# EAGLE board Trial_1_ECE411_Group_15-4 (EAGLE 9.2.0)
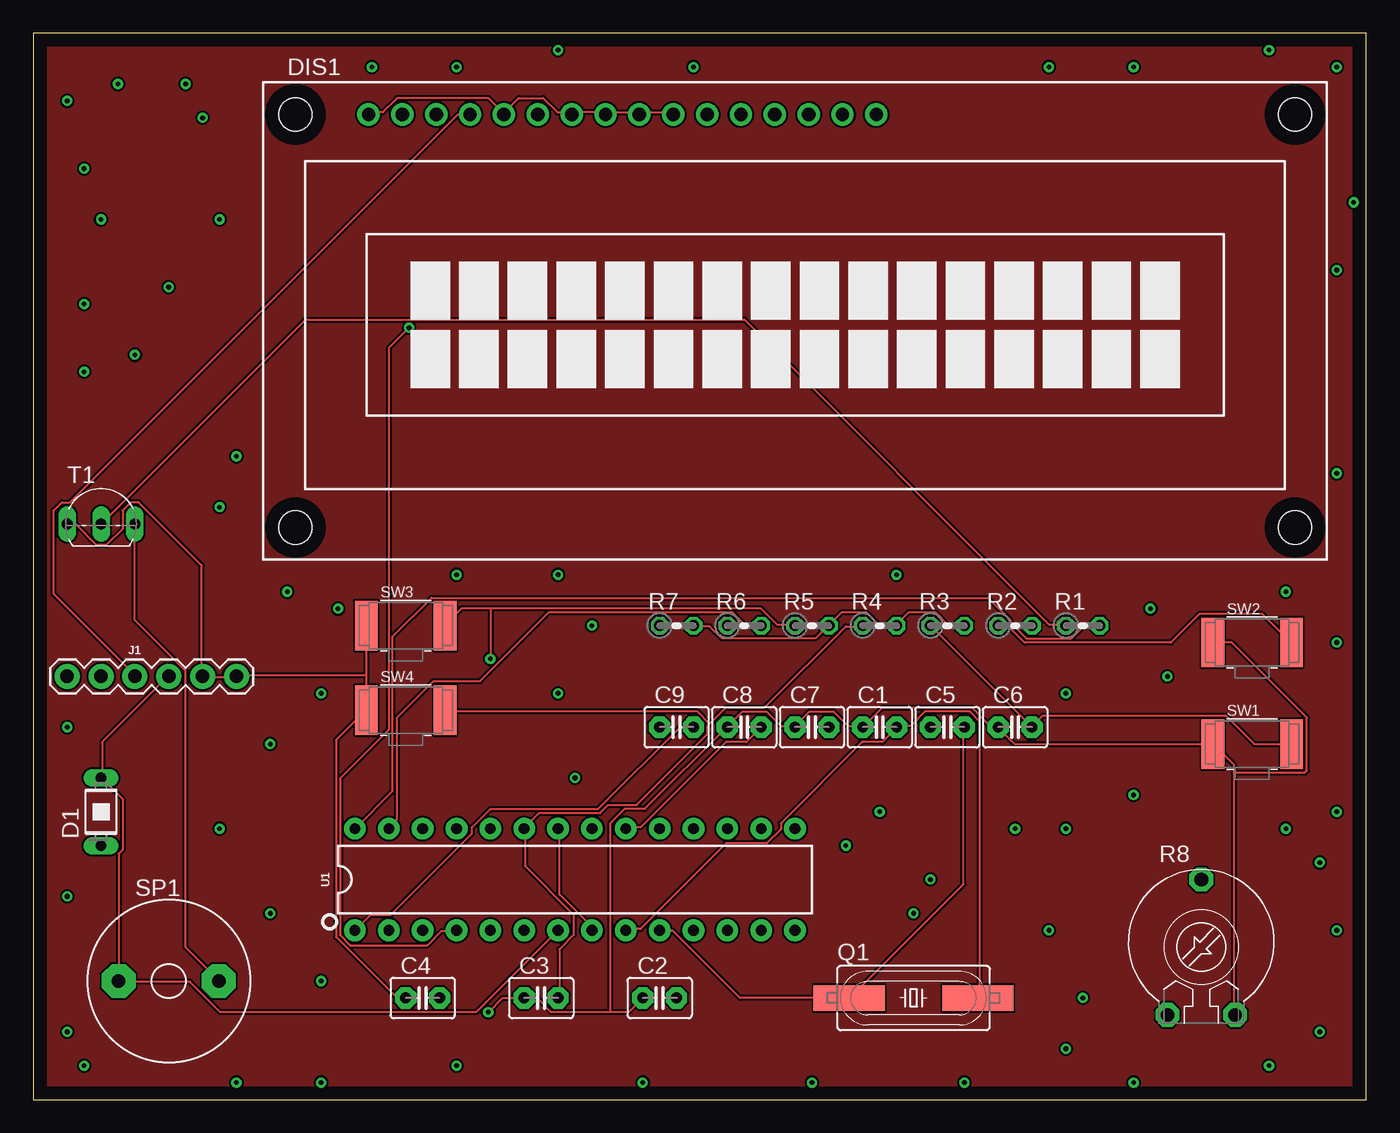
[diagram p0: board, top side]
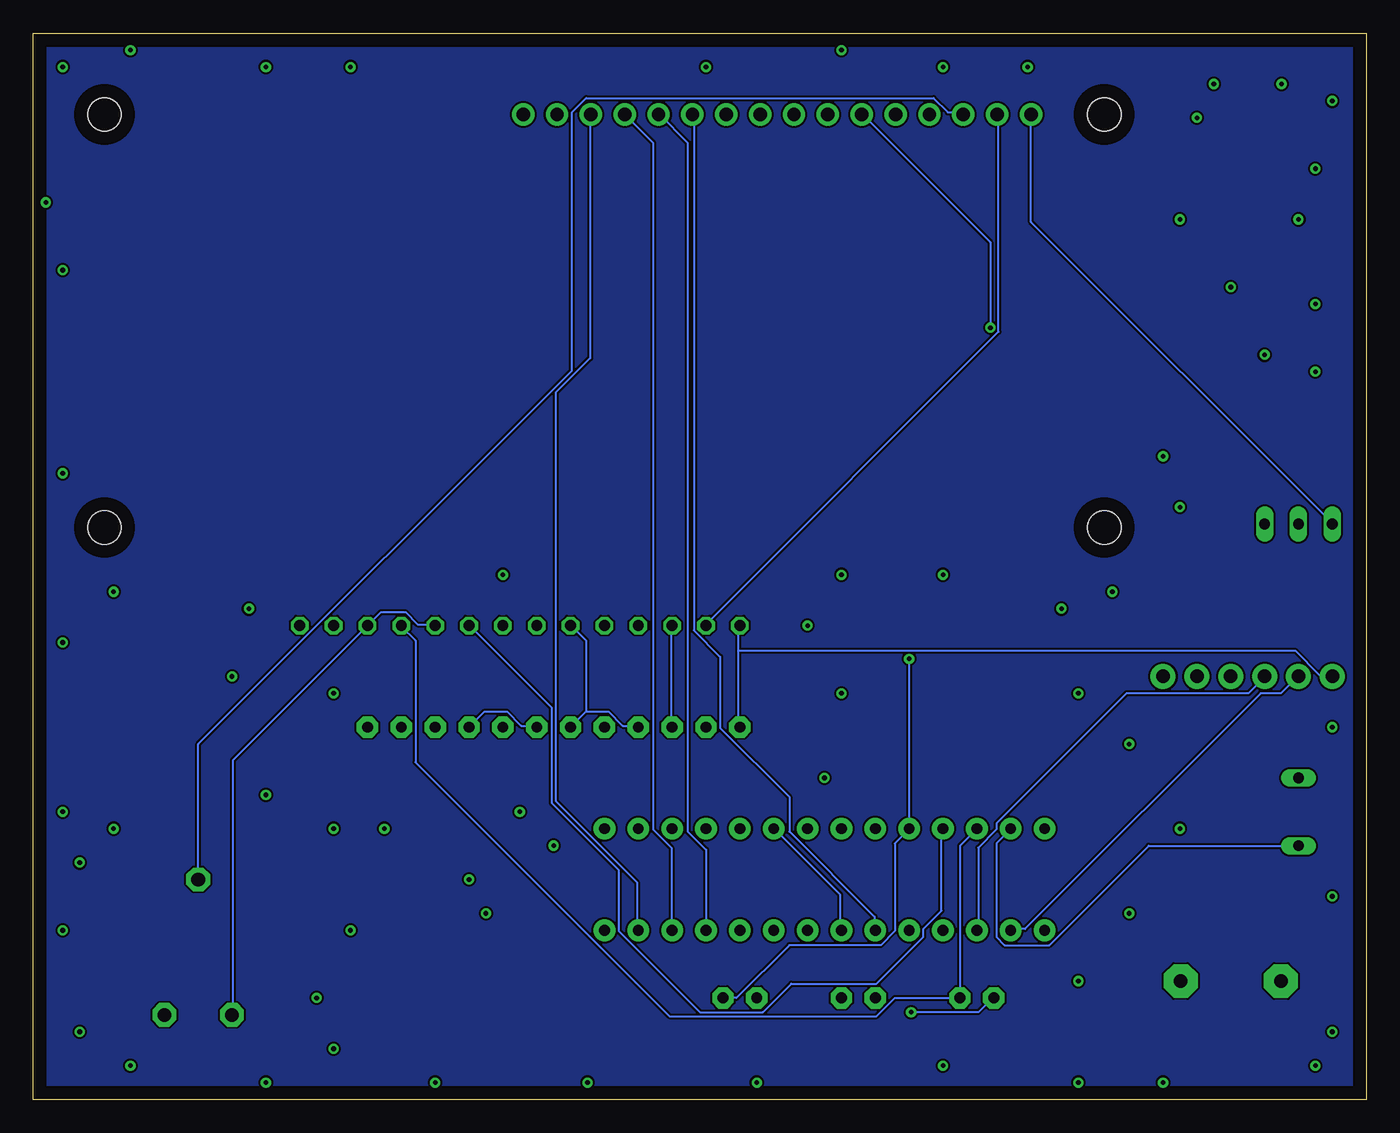
[diagram p1: board, bottom side, seen from below]

Size 100 x 80 mm. Coordinates in mm from the lower left corner, seen from the top.
Outline: 0,0 100,0 100,80 0,80 0,0
Copper layers (1*16): Top 0.035mm / dielectric 1.5mm / Bottom 0.035mm
Design rules "default": minimum track width 6mil, minimum drill 0.35mm, track to track 6mil, track to pad 6mil, pad to pad 6mil, via to via 6mil, smd to smd 6mil, copper to edge 40mil, drill to drill 6mil, minimum pad ring 10mil, minimum via ring 8mil, stop-mask expansion 4mil, vias tented up to drill 0mil, thermal gap 10mil

## Footprints (pad centres in the part's own frame; a part is rotated, then mirrored left to right if it is on the bottom)
C2.5-3 = drill 0.813 pad 1.6 octagon: 1 -1.27,0; 2 1.27,0
BPW32 = drill 0.813 long: A 0,2.54; K 0,-2.54
TUXGR_16X2_R2 = drill 1 pad 1.676: 1 -32,15.5; 2 -29.46,15.5; 3 -26.92,15.5; 4 -24.38,15.5; 5 -21.84,15.5; 6 -19.3,15.5; 7 -16.76,15.5; 8 -14.22,15.5; 9 -11.68,15.5; 10 -9.14,15.5; 11 -6.6,15.5; 12 -4.06,15.5; 13 -1.52,15.5; 14 1.02,15.5; 15 3.56,15.5; 16 6.1,15.5 | hole 2.5: -37.5,-15.5; 37.5,-15.5; -37.5,15.5; 37.5,15.5
FTDI_BASIC = drill 1.016 pad 1.88: CTS 10.16,0; DTR 0,0; GND 12.7,0; RXI 2.54,0; TXO 5.08,0; VCC 7.62,0
HC49UP = smd 5.334 x 1.93: 1 -4.826,0; 2 4.826,0
0204V = drill 0.813 octagon: 1 -1.27,0; 2 1.27,0
PT-10 = drill 1.016 pad 1.778 octagon: 1 -2.54,-5.08; 2 2.54,-5.08; 3 0,5.08
AL60P = drill 1.016 pad 2.54 octagon: 1 -3.759,0; 2 3.759,0
BTN_CK_KSS = smd 1.7 x 3.7: P$1 -2.95,0; P$2 2.95,0
TO92-EBC-OVAL = drill 0.813 long: B 0,-1.27; C 2.54,-1.27; E -2.54,-1.27
DIP28 = drill 0.813 pad 1.626: 1 -16.51,-3.81; 2 -13.97,-3.81; 3 -11.43,-3.81; 4 -8.89,-3.81; 5 -6.35,-3.81; 6 -3.81,-3.81; 7 -1.27,-3.81; 8 1.27,-3.81; 9 3.81,-3.81; 10 6.35,-3.81; 11 8.89,-3.81; 12 11.43,-3.81; 13 13.97,-3.81; 14 16.51,-3.81; 15 16.51,3.81; 16 13.97,3.81; 17 11.43,3.81; 18 8.89,3.81; 19 6.35,3.81; 20 3.81,3.81; 21 1.27,3.81; 22 -1.27,3.81; 23 -3.81,3.81; 24 -6.35,3.81; 25 -8.89,3.81; 26 -11.43,3.81; 27 -13.97,3.81; 28 -16.51,3.81

## Placement (x,y rotation side)
C1  18p  [C2.5-3]  63.5,27.94 0 top
C2  100n  [C2.5-3]  46.99,7.62 0 top
C3  100n  [C2.5-3]  38.1,7.62 0 top
C4  100n  [C2.5-3]  29.21,7.62 0 top
C5  18p  [C2.5-3]  68.58,27.94 0 top
C6  100n  [C2.5-3]  73.66,27.94 0 top
C7  0.1u  [C2.5-3]  58.42,27.94 0 top
C8  0.1u  [C2.5-3]  53.34,27.94 0 top
C9  0.1u  [C2.5-3]  48.26,27.94 0 top
D1  BPW32  [BPW32]  5.08,21.59 0 top
DIS1  TUXGR_16X2_R2  [TUXGR_16X2_R2]  57.15,58.42 0 top
J1  6_PIN_SERIAL_CABLEPTH  [FTDI_BASIC]  2.54,31.75 0 top
Q1  12 MHz  [HC49UP]  66.04,7.62 0 top
R1  200  [0204V]  78.74,35.56 0 top
R2  10k  [0204V]  73.66,35.56 0 top
R3  10k  [0204V]  68.58,35.56 0 top
R4  10k  [0204V]  63.5,35.56 0 top
R5  10k  [0204V]  58.42,35.56 0 top
R6  1k  [0204V]  53.34,35.56 0 top
R7  10k  [0204V]  48.26,35.56 0 top
R8  10k  [PT-10]  87.63,11.43 0 top
SP1  SPEAKER/AL60P  [AL60P]  10.16,8.89 0 top
SW1  [BTN_CK_KSS]  91.44,26.67 0 top
SW2  [BTN_CK_KSS]  91.44,34.29 0 top
SW3  [BTN_CK_KSS]  27.94,35.56 0 top
SW4  [BTN_CK_KSS]  27.94,29.21 0 top
T1  2N2222  [TO92-EBC-OVAL]  5.08,44.45 0 top
U1  328P  [DIP28]  40.64,16.51 0 top

## Library data of the parts
C1-C9 = capacitor-wima
D1 = opto-trans-siemens; OC_FARNELL: unknown; OC_NEWARK: unknown
DIS1 = display-lcd; OC_FARNELL: unknown; OC_NEWARK: unknown
J1 = SparkFun-Connectors
Q1 = adafruit; OC_FARNELL: unknown; OC_NEWARK: unknown
R1-R7 = rcl; SPICEPREFIX: R
R8 = rcl; SPICEMODEL: POT; SPICEPREFIX: X
SP1 SW1-SW4 T1 = adafruit
U1 = SparkFun-IC-Microcontroller; PROD_ID: IC-09136

## Nets
0: C1.1 C2.1 C3.1 C4.1 C5.1 C6.1 C7.1 C8.1 DIS1.1 DIS1.5 DIS1.7 DIS1.8 DIS1.9 DIS1.10 J1.CTS J1.GND R6.1 R8.2 SW1.P$1 SW2.P$1 SW3.P$1 SW4.P$1 T1.E
N$1: C1.2 Q1.2 U1.9
N$2: C5.2 Q1.1 U1.10
N$3: SP1.2 T1.C
N$4: R1.1 T1.B
N$5: C3.2 R4.1 SW4.P$2 U1.23
N$6: C4.2 R2.1 SW2.P$2 U1.26
N$7: J1.RXI U1.2
N$8: C6.2 R3.1 SW1.P$2 U1.25
N$9: DIS1.4 J1.TXO U1.3
N$10: C2.2 R5.1 SW3.P$2 U1.24
N$11: DIS1.3 R8.3
N$13: DIS1.11 U1.6
N$14: DIS1.12 U1.11
N$15: DIS1.13 U1.12
N$16: DIS1.14 U1.13
N$17: D1.K R6.2 U1.27
N$18: R1.2 U1.28
N$19: U1.8 U1.22
N$20: C9.1 J1.DTR R7.1
N$23: DIS1.6 U1.4
N$24: C9.2 U1.1
VCC: C7.2 C8.2 D1.A DIS1.2 J1.VCC R2.2 R3.2 R4.2 R5.2 R7.2 R8.1 SP1.1 U1.7 U1.20

## Tracks (layer width: path | path; a pad name or v marks a point on that pad's centre or on a via)
0  (via drill 0.35)
  Top 0.152: 90.07,24.54 90.07,25.15 88.54,26.67 SW1.P$1 73.61,26.67 72.39,27.89 C6.1 72.39,28.04 71.78,28.04 70.41,29.41 63.7,29.41 C1.1 62.18,28.04 61.11,28.04 60.05,29.11 58.22,29.11 57.15,28.04 | 90.07,24.54 90.07,6.4 R8.2 | SW2.P$1 89.92,34.29 95.56,28.65 95.56,24.69 95.4,24.54 90.07,24.54 | 43.28,6.55 44.65,6.55 C2.1 | 43.28,6.55 38.86,6.55 37.8,7.62 C3.1 35.2,7.62 v34.14,6.55 | 57.15,28.04 56.08,28.04 55.02,29.11 53.19,29.11 52.12,28.04 C8.1 51.97,27.89 45.87,21.79 44.35,21.79 43.28,20.73 43.28,6.55 | 57.15,28.04 C7.1 | C4.1 27.28,7.62 22.71,12.19 22.71,26.98 24.84,29.11 SW4.P$1 24.99,29.26 24.99,31.85 | 24.99,31.85 24.99,35.51 SW3.P$1 | DIS1.10 48.01,74.07 45.57,74.07 DIS1.9 45.41,74.07 42.98,74.07 DIS1.8 42.82,74.07 40.54,74.07 DIS1.7 40.39,74.07 39.32,74.07 38.25,75.13 36.42,75.13 35.36,74.07 DIS1.5 35.2,74.07 34.14,75.13 27.28,75.13 26.21,74.07 25.3,74.07 DIS1.1 | T1.E 2.59,43.13 3.2,43.13 4.72,41.6 5.49,41.6 6.71,42.82 6.71,44.2 7.32,44.81 7.92,44.81 12.65,40.08 12.65,31.85 J1.CTS 12.8,31.7 15.24,31.7 J1.GND 15.24,31.85 24.99,31.85
  Bottom 0.152: C5.1 66.14,29.11 64.47,29.11 63.4,28.04 62.33,28.04 C1.1 | R6.1 52.12,35.51 52.12,28.04 C8.1 | DIS1.1 25.15,65.84 2.59,43.28 T1.E | v34.14,6.55 29.11,6.55 28.04,7.62 C4.1
GND
  pour Top: 0,80.01 100.33,80.01 100.33,0 0,0 0,43.18
  pour Bottom: 0,80.01 100.33,80.01 100.33,0 41.91,0 0,0 0,36.83
N$1
  Top 0.152: Q1.2 71.02,7.77 71.02,28.35 70.26,29.11 66.9,29.11 65.84,28.04 64.77,28.04 C1.2 64.77,27.89 63.7,26.82 62.18,26.82 56.08,20.73 56.08,20.27 55.02,19.2 51.97,19.2 45.57,12.8 44.5,12.8 U1.9
N$2
  Top 0.152: C5.2 69.8,27.89 69.8,16.15 61.27,7.62 Q1.1 53.03,7.62 48.01,12.65 47.09,12.65 U1.10
N$3
  Top 0.152: T1.C 7.62,35.97 11.43,32.16 11.43,11.43 13.87,8.99 SP1.2
N$4
  Top 0.152: T1.B 20.42,58.52 53.34,58.52 76.2,35.66 77.42,35.66 R1.1
N$5
  Top 0.152: 50.75,28.19 50.6,28.04 50.6,27.43 45.26,22.1 43.13,22.1 42.52,21.49 37.95,21.49 36.88,20.42 U1.23 36.88,20.27 36.88,17.53 40.54,13.87 40.54,12.34 39.47,11.28 39.47,7.62 C3.2 | 50.75,28.19 51.97,29.41 54.86,29.41 60.96,35.51 62.18,35.51 R4.1 | 50.75,28.19 49.84,29.11 30.94,29.11 SW4.P$2
N$6
  Top 0.152: R2.1 72.39,35.51 73.15,35.51 74.37,34.29 85.34,34.29 87.48,36.42 92.2,36.42 94.34,34.29 SW2.P$2
  Bottom 0.152: U1.26 30.48,19.05 C4.2 35.36,7.62 36.73,6.25 52.27,6.25 71.32,25.3 71.32,34.44 72.39,35.51 R2.1
N$7
  Bottom 0.152: U1.2 26.67,12.8 25.6,12.8 7.92,30.48 6.4,30.48 5.18,31.7 J1.RXI
N$8
  Top 0.152: R3.1 C6.2 74.98,28.04 75.74,28.8 89.46,28.8 91.59,26.67 SW1.P$2
  Bottom 0.152: U1.25 31.85,20.27 31.85,14.17 33.22,12.8 33.22,12.19 36.73,8.69 43.13,8.69 45.26,6.55 49.99,6.55 56.08,12.65 56.08,17.22 61.11,22.25 61.11,29.41 67.21,35.51 R3.1
N$9
  Top 0.152: DIS1.4 31.85,73.91 2.74,44.81 2.13,44.81 1.52,44.2 1.52,37.95 7.62,31.85 J1.TXO
  Bottom 0.152: U1.3 29.11,12.8 29.11,18.9 27.74,20.27 27.74,20.73 17.98,30.48 8.84,30.48 7.62,31.7 J1.TXO
N$10  (via drill 0.35)
  Top 0.152: 34.29,36.88 32.16,36.88 30.94,35.66 SW3.P$2 | 34.29,36.88 54.56,36.88 55.78,35.66 57.15,35.66 R5.1 | 34.29,36.88 v34.29,33.07
  Bottom 0.152: C2.2 47.24,7.62 43.28,11.58 36.42,11.58 35.36,12.65 35.36,19.2 34.29,20.27 U1.24 v34.29,33.07
N$11
  Bottom 0.152: R8.3 87.63,26.67 59.59,54.71 59.59,74.07 58.52,75.13 32.46,75.13 31.39,74.07 30.33,74.07 DIS1.3
N$12  (via drill 0.35)
  other vias: 6.35,76.2
N$13
  Bottom 0.152: U1.6 36.88,12.8 36.88,13.72 43.28,20.12 43.28,22.71 48.46,27.89 48.46,33.22 50.44,35.2 50.44,73.91 DIS1.11
N$14
  Bottom 0.152: U1.11 49.53,18.75 50.9,20.12 50.9,71.78 53.03,73.91 DIS1.12
N$15
  Bottom 0.152: U1.12 52.12,12.8 52.12,18.9 53.49,20.27 53.49,71.78 DIS1.13
N$16
  Bottom 0.152: U1.13 54.71,12.8 54.71,16.31 60.81,22.4 60.81,53.03 58.22,55.63 58.22,73.91 DIS1.14
N$17
  Top 0.152: R6.2 54.56,35.66 53.34,35.66 52.43,36.58 38.71,36.58 33.53,31.39 30.02,31.39 27.28,28.65 27.28,21.03 26.67,20.42 U1.27
  Bottom 0.152: D1.K 16.31,19.05 23.77,11.58 27.13,11.58 27.74,12.19 27.74,19.2 26.67,20.27 U1.27
N$18
  Top 0.152: U1.28 26.98,23.16 26.98,34.75 29.87,37.64 71.63,37.64 73.3,35.97 73.3,35.81 74.52,34.59 77.88,34.59 78.79,35.51 80.01,35.51 R1.2
N$19
  Top 0.152: U1.8 41.91,12.95 39.47,15.39 39.47,20.27 U1.22
N$20
  Bottom 0.152: 47.09,33.68 47.09,28.04 C9.1 | 47.09,33.68 47.09,35.51 R7.1 | 47.09,33.68 5.33,33.68 3.5,31.85 2.59,31.85 J1.DTR
N$21  (via drill 0.35)
  other vias: 2.54,74.93
N$22  (via drill 0.35)
  other vias: 5.08,66.04
N$23  (via drill 0.35)
  Top 0.152: v28.19,57.91 26.67,56.39 26.67,27.74 23.01,24.08 23.01,12.34 23.77,11.58 29.57,11.58 30.63,12.65 31.7,12.65 U1.4
  Bottom 0.152: v28.19,57.91 28.19,64.31 37.8,73.91 DIS1.6
N$24
  Top 0.152: U1.1 25.3,13.87 26.82,13.87 32.92,19.96 32.92,20.42 34.29,21.79 42.37,21.79 48.46,27.89 49.53,27.89 C9.2
N$25  (via drill 0.35)
  other vias: 13.97,66.04
N$26  (via drill 0.35)
  other vias: 10.16,60.96
N$27  (via drill 0.35)
  other vias: 3.81,54.61
N$28  (via drill 0.35)
  other vias: 12.7,73.66
N$29  (via drill 0.35)
  other vias: 25.4,77.47
N$30  (via drill 0.35)
  other vias: 39.37,78.74
N$31  (via drill 0.35)
  other vias: 49.53,77.47
N$32  (via drill 0.35)
  other vias: 82.55,77.47
N$33  (via drill 0.35)
  other vias: 76.2,77.47
N$34  (via drill 0.35)
  other vias: 92.71,78.74
N$35  (via drill 0.35)
  other vias: 97.79,77.47
N$36  (via drill 0.35)
  other vias: 99.06,67.31
N$37  (via drill 0.35)
  other vias: 97.79,62.23
N$38  (via drill 0.35)
  other vias: 97.79,46.99
N$39  (via drill 0.35)
  other vias: 97.79,34.29
N$40  (via drill 0.35)
  other vias: 83.82,36.83
N$41  (via drill 0.35)
  other vias: 77.47,20.32
N$42  (via drill 0.35)
  other vias: 82.55,22.86
N$43  (via drill 0.35)
  other vias: 76.2,12.7
N$44  (via drill 0.35)
  other vias: 78.74,7.62
N$45  (via drill 0.35)
  other vias: 97.79,21.59
N$46  (via drill 0.35)
  other vias: 93.98,20.32
N$47  (via drill 0.35)
  other vias: 97.79,12.7
N$48  (via drill 0.35)
  other vias: 96.52,5.08
N$49  (via drill 0.35)
  other vias: 92.71,2.54
N$50  (via drill 0.35)
  other vias: 82.55,1.27
N$51  (via drill 0.35)
  other vias: 77.47,3.81
N$52  (via drill 0.35)
  other vias: 69.85,1.27
N$53  (via drill 0.35)
  other vias: 58.42,1.27
N$54  (via drill 0.35)
  other vias: 66.04,13.97
N$55  (via drill 0.35)
  other vias: 67.31,16.51
N$56  (via drill 0.35)
  other vias: 63.5,21.59
N$57  (via drill 0.35)
  other vias: 60.96,19.05
N$58  (via drill 0.35)
  other vias: 40.64,24.13
N$59  (via drill 0.35)
  other vias: 17.78,26.67
N$60  (via drill 0.35)
  other vias: 21.59,30.48
N$61  (via drill 0.35)
  other vias: 13.97,44.45
N$62  (via drill 0.35)
  other vias: 7.62,55.88
N$63  (via drill 0.35)
  other vias: 21.59,8.89
N$64  (via drill 0.35)
  other vias: 17.78,13.97
N$65  (via drill 0.35)
  other vias: 2.54,5.08
N$66  (via drill 0.35)
  other vias: 2.54,15.24
N$67  (via drill 0.35)
  other vias: 21.59,1.27
N$68  (via drill 0.35)
  other vias: 31.75,2.54
N$69  (via drill 0.35)
  other vias: 45.72,1.27
N$70  (via drill 0.35)
  other vias: 15.24,1.27
N$71  (via drill 0.35)
  other vias: 15.24,48.26
N$72  (via drill 0.35)
  other vias: 3.81,59.69
N$73  (via drill 0.35)
  other vias: 11.43,76.2
N$74  (via drill 0.35)
  other vias: 64.77,39.37
N$75  (via drill 0.35)
  other vias: 39.37,39.37
N$76  (via drill 0.35)
  other vias: 31.75,39.37
N$77  (via drill 0.35)
  other vias: 19.05,38.1
N$78  (via drill 0.35)
  other vias: 22.86,36.83
N$79  (via drill 0.35)
  other vias: 39.37,30.48
N$80  (via drill 0.35)
  other vias: 41.91,35.56
N$81  (via drill 0.35)
  other vias: 77.47,30.48
N$82  (via drill 0.35)
  other vias: 85.09,31.75
N$83  (via drill 0.35)
  other vias: 73.66,20.32
N$84  (via drill 0.35)
  other vias: 13.97,20.32
N$85  (via drill 0.35)
  other vias: 2.54,27.94
N$86  (via drill 0.35)
  other vias: 3.81,69.85
N$87  (via drill 0.35)
  other vias: 31.75,77.47
N$88  (via drill 0.35)
  other vias: 93.98,38.1
N$89  (via drill 0.35)
  other vias: 96.52,17.78
N$90  (via drill 0.35)
  other vias: 3.81,2.54
VCC
  Top 0.152: J1.VCC 10.06,31.7 5.18,26.82 5.18,24.23 D1.A 5.18,24.08 6.71,22.55 6.71,18.75 6.4,18.44 SP1.1 6.4,8.84 11.73,8.84 14.02,6.55 33.22,6.55 U1.7 | R7.2 49.53,35.51 50.75,35.51 51.66,34.59 58.67,34.59 59.59,35.51 R5.2 59.74,35.66 60.66,36.58 62.48,36.58 63.4,35.66 64.77,35.66 | C8.2 53.49,26.82 51.97,26.82 45.57,20.42 44.5,20.42 U1.20 | 64.77,35.66 65.68,36.58 67.67,36.58 68.58,35.66 69.8,35.66 R3.2 | 64.77,35.66 R4.2
  Bottom 0.152: R3.2 69.95,35.66 71.17,35.66 72.08,36.58 73.91,36.58 R2.2 85.04,25.45 85.04,6.4 R8.1 | U1.7 39.47,12.8 39.47,15.39 44.35,20.27 U1.20 | 58.52,29.11 56.84,29.11 55.78,28.04 54.71,28.04 C8.2 | C7.2 58.52,29.11 | DIS1.2 27.58,73.91 27.58,57.61 49.53,35.66 R7.2 | 58.52,29.11 58.52,34.44 59.59,35.51 R5.2